# EAGLE board BeagleboneCape (EAGLE 6.4)
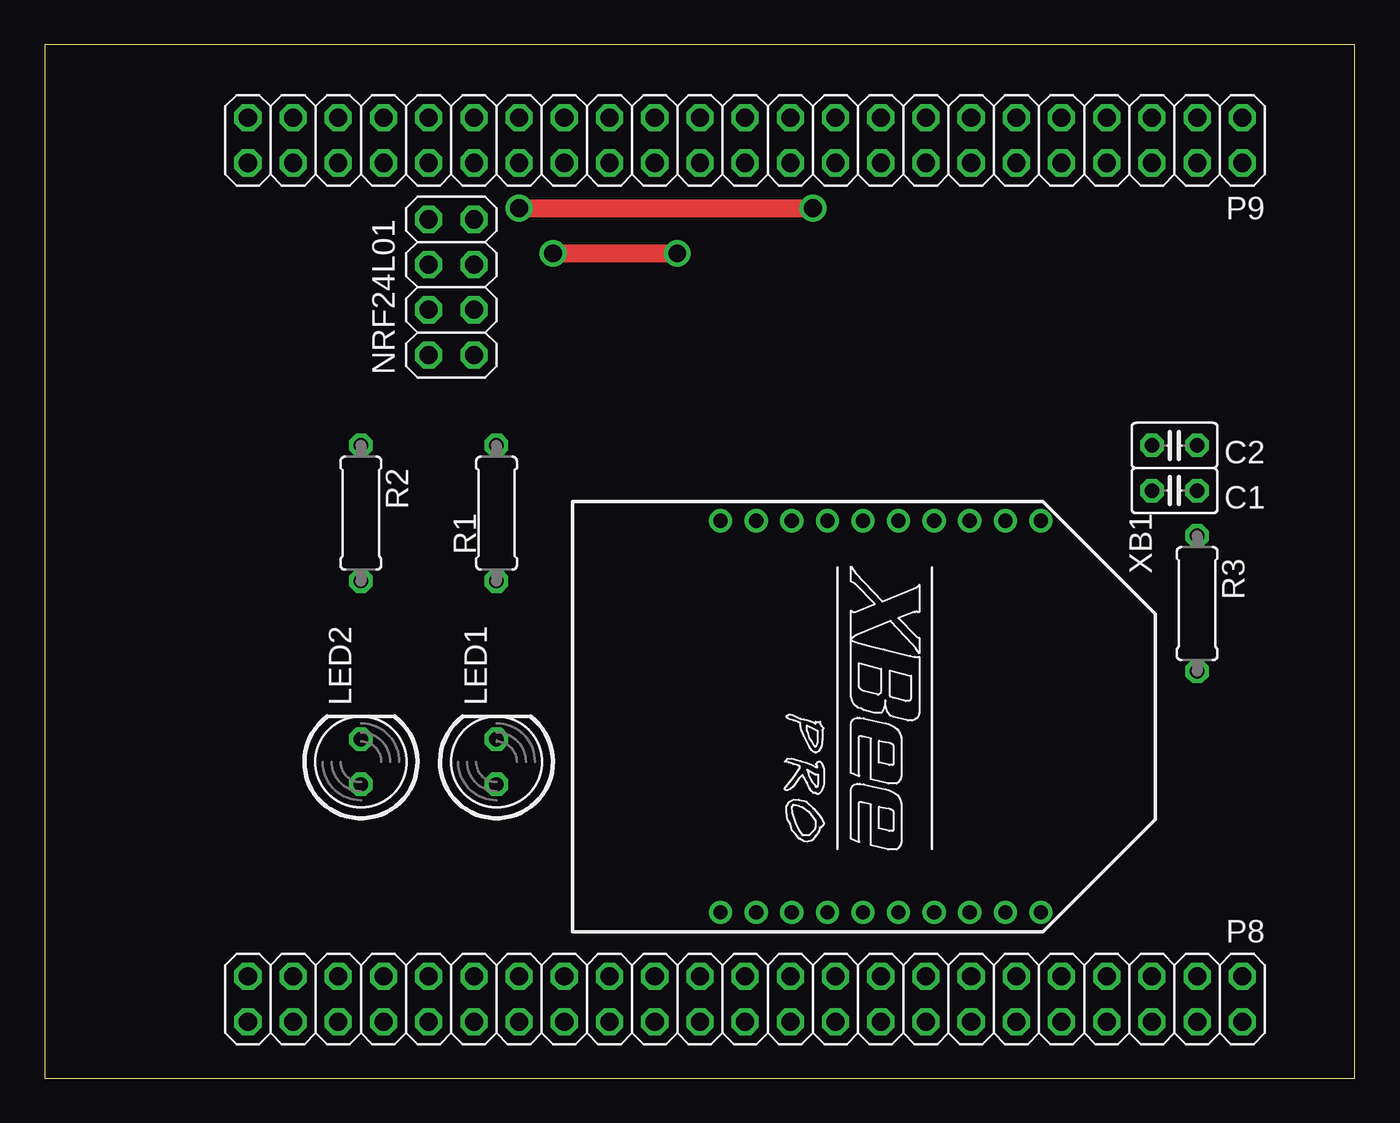
[diagram p0: board, top side]
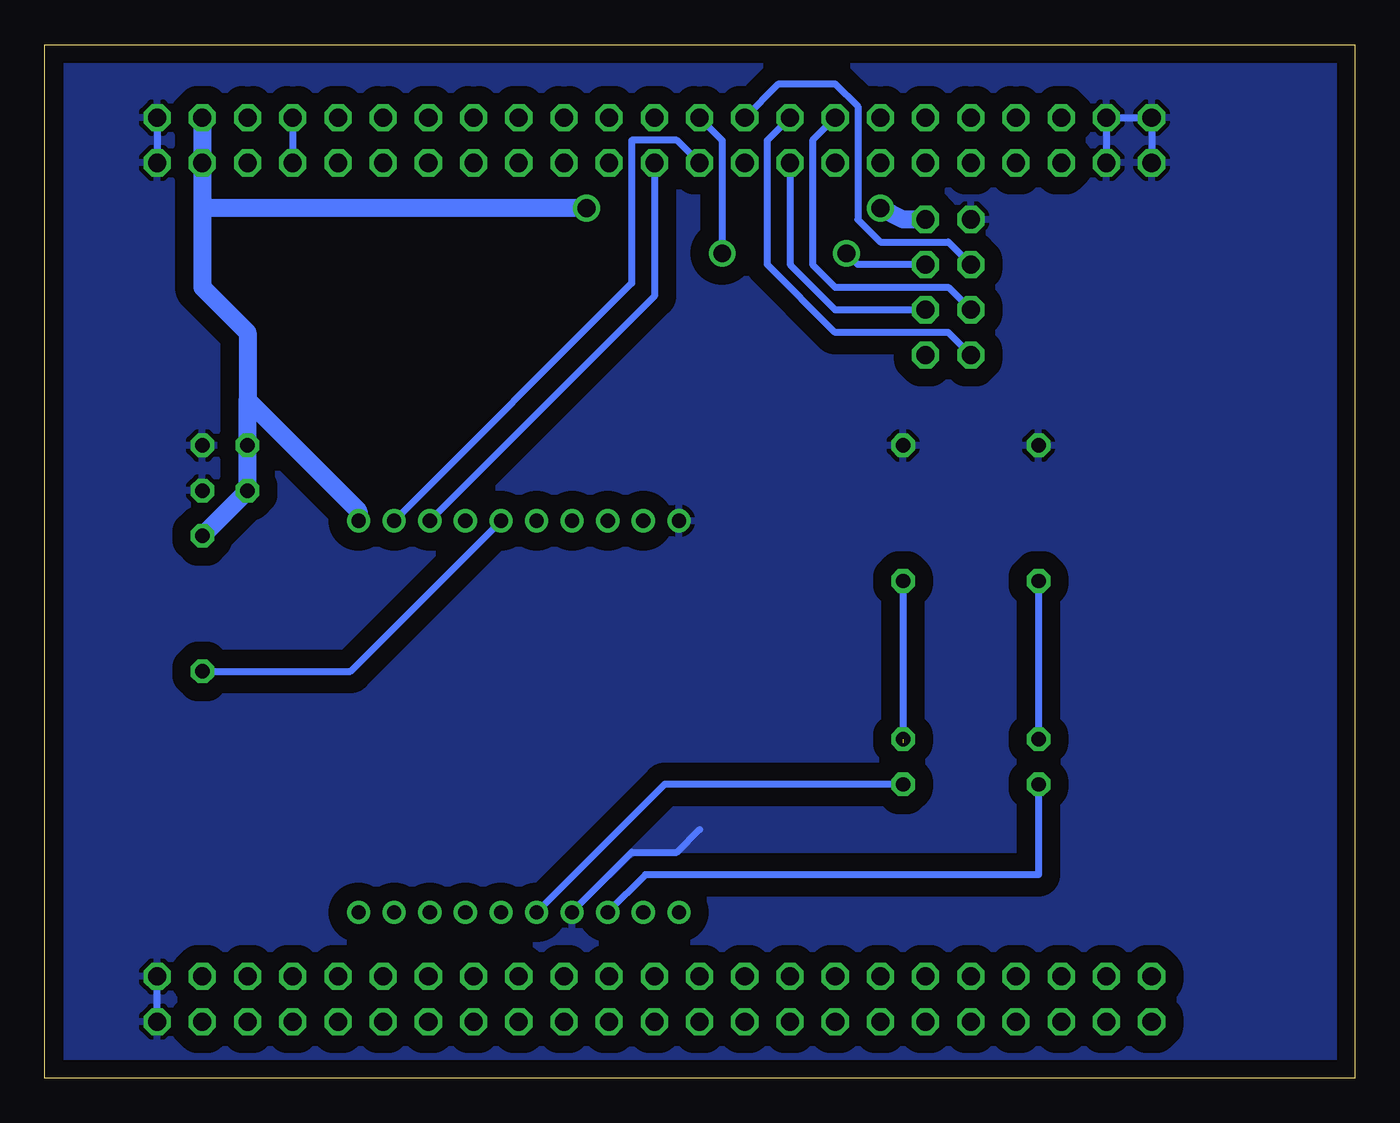
[diagram p1: board, bottom side, seen from below]

Size 73.64 x 58.09 mm. Coordinates in mm from the lower left corner, seen from the top.
Outline: 0,0 73.64,0 73.64,58.09 0,58.09 0,0
Copper layers (1*16): Top 0.035mm / dielectric 1.5mm / Bottom 0.035mm
Design rules "default": minimum track width 10mil, minimum drill 24mil, track to track 8mil, track to pad 8mil, pad to pad 8mil, via to via 8mil, smd to smd 8mil, copper to edge 40mil, drill to drill 8mil, minimum pad ring 10mil, minimum via ring 8mil, stop-mask expansion 4mil, vias tented up to drill 0mil, thermal gap 10mil

## Footprints (pad centres in the part's own frame; a part is rotated, then mirrored left to right if it is on the bottom)
C025-025X050 = drill 0.813 octagon: 1 -1.27,0; 2 1.27,0
LED5MM = drill 0.813 octagon: A -1.27,0; K 1.27,0
2X04 = drill 1.016 octagon: 1 -3.81,-1.27; 2 -3.81,1.27; 3 -1.27,-1.27; 4 -1.27,1.27; 5 1.27,-1.27; 6 1.27,1.27; 7 3.81,-1.27; 8 3.81,1.27
2X23 = drill 1.016 octagon: 1 -27.94,-1.27; 2 -27.94,1.27; 3 -25.4,-1.27; 4 -25.4,1.27; 5 -22.86,-1.27; 6 -22.86,1.27; 7 -20.32,-1.27; 8 -20.32,1.27; 9 -17.78,-1.27; 10 -17.78,1.27; 11 -15.24,-1.27; 12 -15.24,1.27; 13 -12.7,-1.27; 14 -12.7,1.27; 15 -10.16,-1.27; 16 -10.16,1.27; 17 -7.62,-1.27; 18 -7.62,1.27; 19 -5.08,-1.27; 20 -5.08,1.27; 21 -2.54,-1.27; 22 -2.54,1.27; 23 0,-1.27; 24 0,1.27; 25 2.54,-1.27; 26 2.54,1.27; 27 5.08,-1.27; 28 5.08,1.27; 29 7.62,-1.27; 30 7.62,1.27; 31 10.16,-1.27; 32 10.16,1.27; 33 12.7,-1.27; 34 12.7,1.27; 35 15.24,-1.27; 36 15.24,1.27; 37 17.78,-1.27; 38 17.78,1.27; 39 20.32,-1.27; 40 20.32,1.27; 41 22.86,-1.27; 42 22.86,1.27; 43 25.4,-1.27; 44 25.4,1.27; 45 27.94,-1.27; 46 27.94,1.27
0207/7 = drill 0.813 octagon: 1 -3.81,0; 2 3.81,0
XBEE-PRO = drill 0.8 pad 1.27: 1 -11,9; 2 -11,7; 3 -11,5; 4 -11,3; 5 -11,1; 6 -11,-1; 7 -11,-3; 8 -11,-5; 9 -11,-7; 10 -11,-9; 11 11,-9; 12 11,-7; 13 11,-5; 14 11,-3; 15 11,-1; 16 11,1; 17 11,3; 18 11,5; 19 11,7; 20 11,9

## Placement (x,y rotation side)
C1  1u  [C025-025X050]  63.5,33.02 0 top
C2  8.2p  [C025-025X050]  63.5,35.56 0 top
LED1  Assoc  [LED5MM]  25.4,17.78 90 top
LED2  ON_SLEEP  [LED5MM]  17.78,17.78 90 top
NRF24L01  NRF1  [2X04]  22.86,44.45 270 top
P8  HEADER1  [2X23]  39.37,4.45 180 top
P9  HEADER2  [2X23]  39.37,52.7 180 top
R1  110R  [0207/7]  25.4,31.75 270 top
R2  110R  [0207/7]  17.78,31.75 270 top
R3  110R  [0207/7]  64.77,26.67 270 top
XB1  XBEE-PRO  [XBEE-PRO]  46.99,20.32 270 top

## Library data of the parts
C1 C2 R1-R3 = rcl
LED1 LED2 = led
NRF24L01 = pinhead
P8 P9 = 2X23Header
XB1 = xbee; MPN: XBP24-AWI-001; OC_FARNELL: 1337916; OC_NEWARK: 42M2667

## Nets
3.3V: C1.1 C2.1 NRF24L01.2 P9.3 P9.4 R3.1 XB1.1
5.0V: P9.7 P9.8
ASSOC: LED1.A XB1.15
BB_RX: P9.26 XB1.2
BB_TX: P9.24 XB1.3
CE: NRF24L01.3 P9.27
CSN: NRF24L01.4 P9.25
GND: C1.2 C2.2 NRF24L01.1 P8.1 P8.2 P9.1 P9.2 P9.43 P9.44 P9.45 P9.46 R1.1 R2.1 XB1.10 XB1.14
IRQ: NRF24L01.8
MISO: NRF24L01.7 P9.29
MOSI: NRF24L01.6 P9.30
N$1: LED1.K R1.2
N$2: R3.2 XB1.5
N$3: LED2.K R2.2
ON_SLEEP: LED2.A XB1.13
SCK: NRF24L01.5 P9.31

## Tracks (layer width: path | path; a pad name or v marks a point on that pad's centre or on a via)
3.3V  (via drill 1)
  Top 1.016: v26.67,48.9 v43.18,48.9
  Bottom 0.406: 55.99,31.86 55.88,31.75
  Bottom 1.016: P9.3 P9.4 64.77,48.9 | 64.77,48.9 64.77,44.45 62.23,41.91 62.23,38.1 | 62.23,38.1 55.99,31.86 XB1.1 | 62.23,38.1 C2.1 C1.1 R3.1 | NRF24L01.2 25.4,48.26 v26.67,48.9 | v43.18,48.9 64.77,48.9
5.0V
  Bottom 0.406: P9.7 P9.8
ASSOC
  Bottom 0.406: LED1.A 38.8,16.51 XB1.15
BB_RX
  Bottom 0.406: P9.26 38.1,52.7 40.64,52.7 40.64,44.67 XB1.2
BB_TX
  Bottom 0.406: 39.24,51.44 P9.24 39.37,43.94 XB1.3
CE
  Bottom 0.406: P9.27 32.38,55.88 29.21,55.88 27.94,54.61 27.94,48.26 26.67,46.99 22.86,46.99 NRF24L01.3
CSN  (via drill 1)
  Top 1.016: v28.57,46.35 v35.56,46.35
  Bottom 0.406: P9.25 35.56,52.7 v35.56,46.35 | NRF24L01.4 27.94,45.72 v28.57,46.35
GND
  Bottom 0.406: P9.1 P9.2 | P9.46 P9.45 P9.43 P9.44 | P8.2 P8.1 | XB1.14 43.99,9.35 40.64,12.7 38.1,12.7 36.83,13.97
  pour Bottom (isolate 1.016): 0,0 0,58.42 72.39,58.42 72.39,0
MISO
  Bottom 0.406: NRF24L01.7 22.86,41.91 29.21,41.91 33.02,45.72 33.02,52.7 P9.29
MOSI
  Bottom 0.406: P9.30 31.75,45.72 29.21,43.18 NRF24L01.6
N$1  (1 unrouted)
  Bottom 0.406: R1.2 25.4,18.83
N$2
  Bottom 0.406: R3.2 56.45,22.86 XB1.5
N$3
  Bottom 0.406: R2.2 LED2.K
ON_SLEEP
  Bottom 0.406: LED2.A 17.78,11.43 39.88,11.43 XB1.13
SCK
  Bottom 0.406: P9.31 30.48,52.7 30.48,45.72 29.21,44.45 22.86,44.45 NRF24L01.5

## Text on the board
_tNames: Smart Home BB-WIRELESS | 2015 Rev. A